# EAGLE board ParticlePCB (EAGLE 9.3.0)
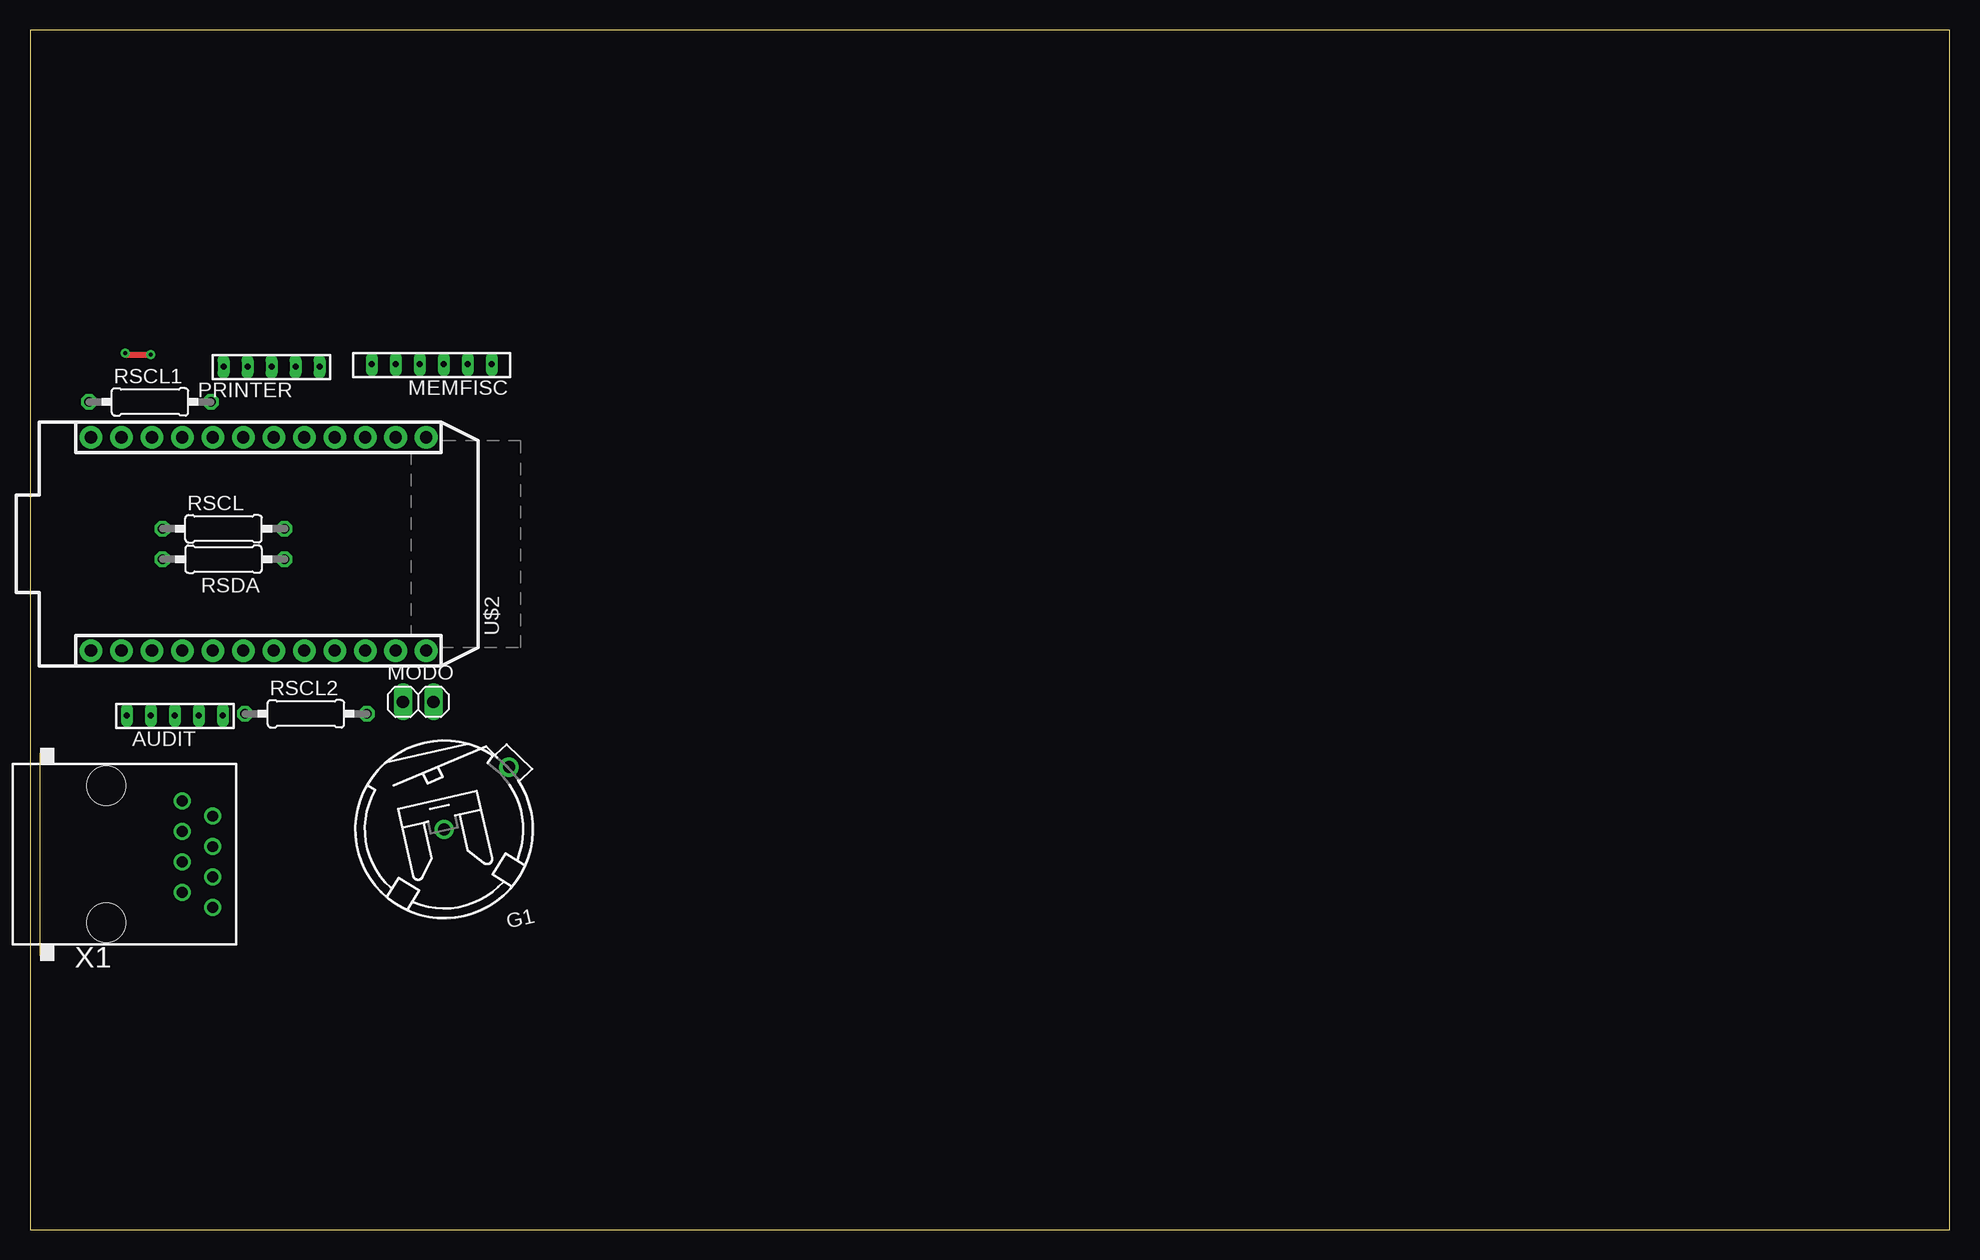
[diagram p0: board, top side]
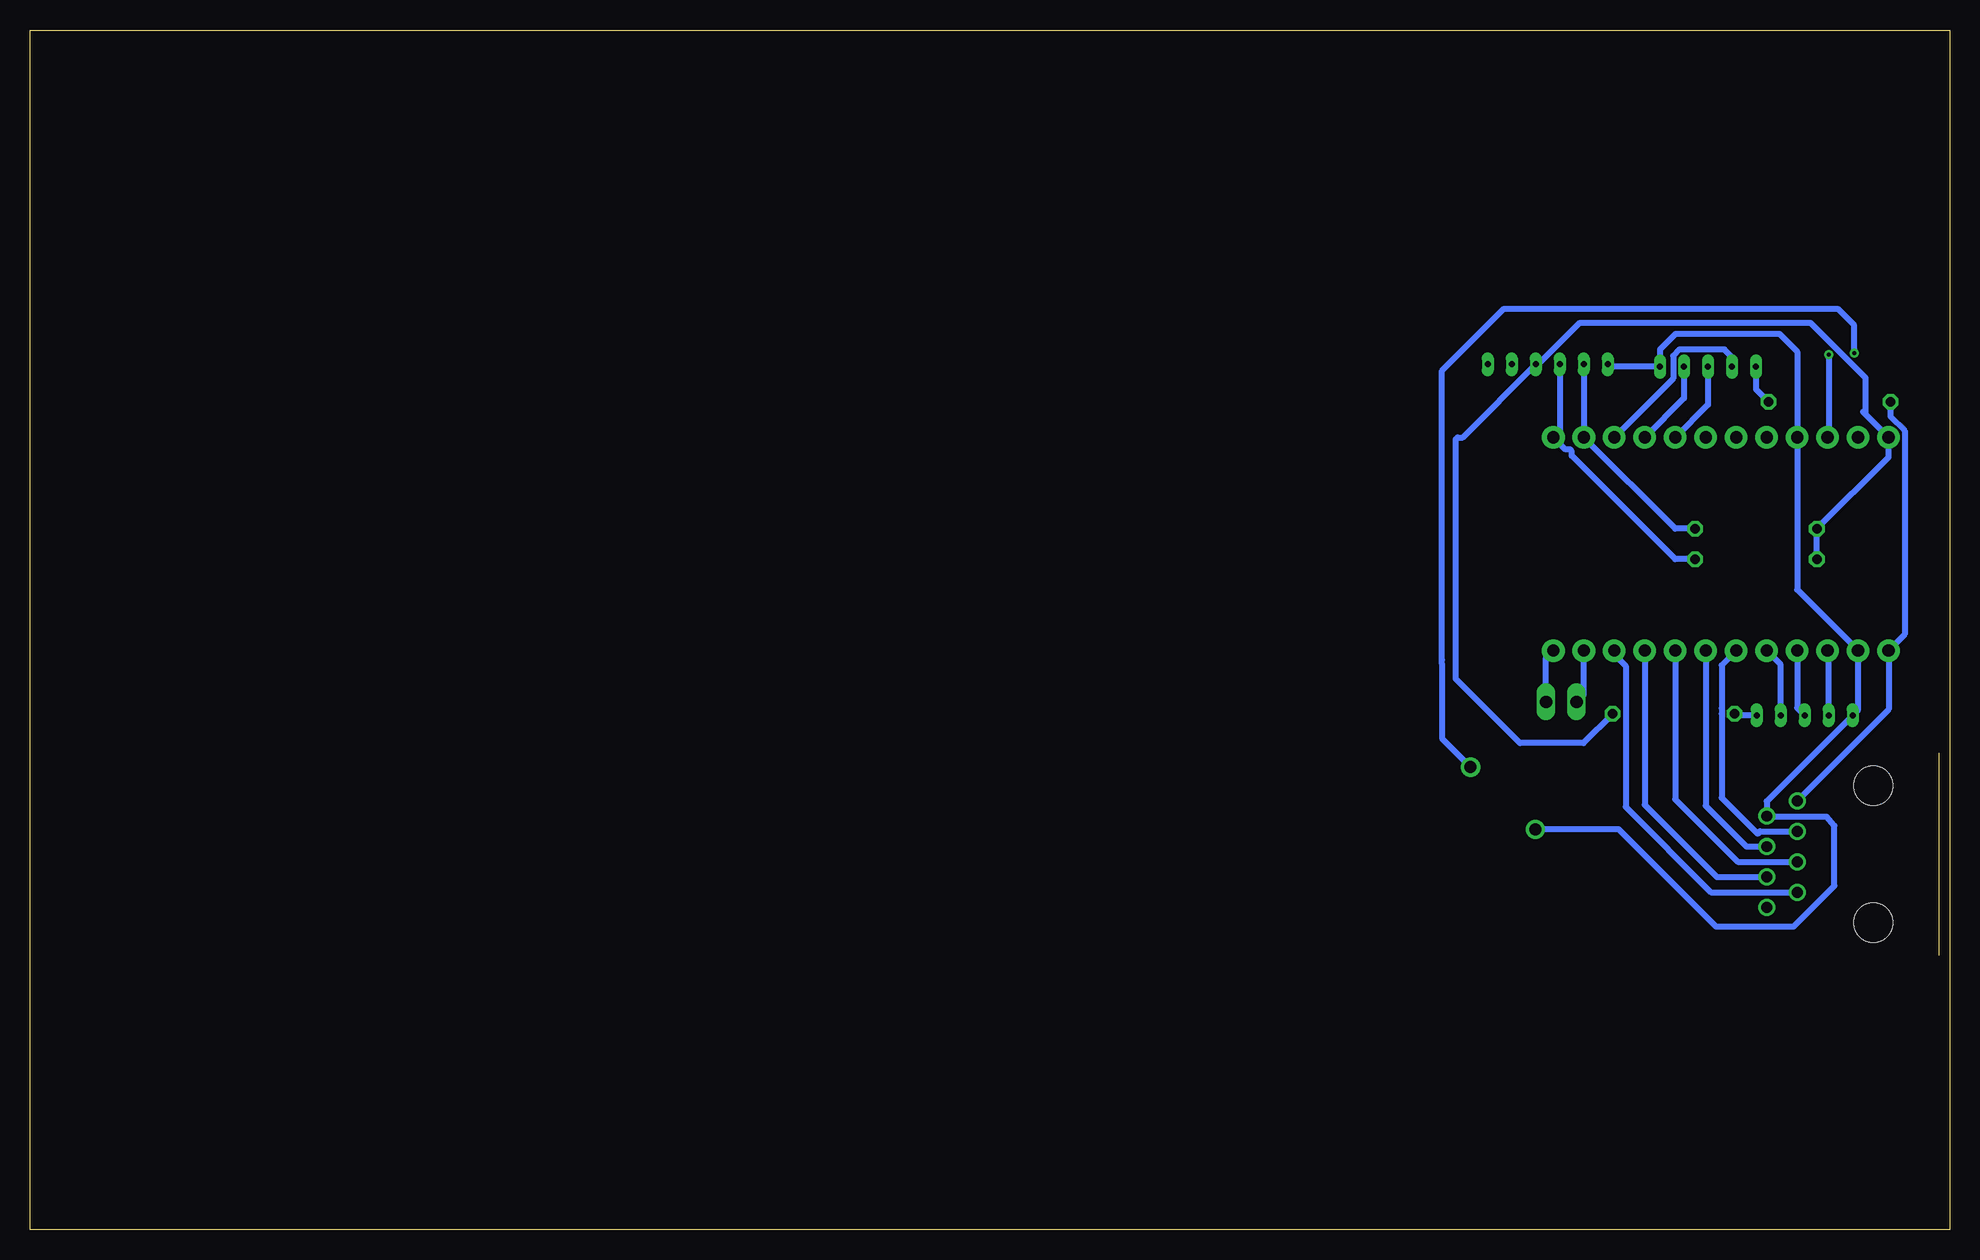
[diagram p1: board, bottom side, seen from below]

Size 160 x 100 mm. Coordinates in mm from the lower left corner, seen from the top.
Outline: 0,0 160,0 160,100 0,100 0,0
Copper layers (1*16): Top 0.035mm / dielectric 1.5mm / Bottom 0.035mm
Design rules "default": minimum track width 6mil, minimum drill 0.35mm, track to track 6mil, track to pad 6mil, pad to pad 6mil, via to via 6mil, smd to smd 6mil, copper to edge 40mil, drill to drill 6mil, minimum pad ring 10mil, minimum via ring 8mil, stop-mask expansion 4mil, vias tented up to drill 0mil, thermal gap 10mil

## Footprints (pad centres in the part's own frame; a part is rotated, then mirrored left to right if it is on the bottom)
53047-05 = drill 0.5 pad 0.698 long: 1 0,2.55; 2 2,2.55; 3 4,2.55; 4 6,2.55; 5 8,2.55
CH23-1220LF = drill 1 pad 1.6: + -6.425,-3.862; - 0,0
53047-06 = drill 0.5 pad 0.698 long: 1 7,0.45; 2 5,0.45; 3 3,0.45; 4 1,0.45; 5 -1,0.45; 6 -3,0.45
1X02 = drill 1.016 long: 1 -1.27,0; 2 1.27,0
0207/10 = drill 0.813 octagon: 1 -5.08,0; 2 5.08,0
PHOTON = drill 1.016 pad 1.88: 1 1.27,33.02; 2 1.27,30.48; 3 1.27,27.94; 4 1.27,25.4; 5 1.27,22.86; 6 1.27,20.32; 7 1.27,17.78; 8 1.27,15.24; 9 1.27,12.7; 10 1.27,10.16; 11 1.27,7.62; 12 1.27,5.08; 13 19.05,5.08; 14 19.05,7.62; 15 19.05,10.16; 16 19.05,12.7; 17 19.05,15.24; 18 19.05,17.78; 19 19.05,20.32; 20 19.05,22.86; 21 19.05,25.4; 22 19.05,27.94; 23 19.05,30.48; 24 19.05,33.02
RJ45-NO-SHIELD = drill 0.9 pad 1.4: 1 -4.445,6.35; 2 -3.175,8.89; 3 -1.905,6.35; 4 -0.635,8.89; 5 0.635,6.35; 6 1.905,8.89; 7 3.175,6.35; 8 4.445,8.89 | hole 3.251: -5.715,0; 5.715,0

## Placement (x,y rotation side)
AUDIT  53047-05  [53047-05]  8.08,40.31 0 top
G1  CH23-1220LF  [CH23-1220LF]  34.51,33.36 192.8 top
MEMFISC  53047-06  [53047-06]  35.48,72.58 180 top
MODO  TECNICO  [1X02]  32.36,43.99 0 top
PRINTER  53047-05  [53047-05]  16.13,69.39 0 top
RSCL  10k  [0207/10]  16.13,58.42 0 top
RSCL1  10k  [0207/10]  10,69 0 top
RSCL2  10k  [0207/10]  23,43 0 top
RSDA  10k  [0207/10]  16.13,55.88 180 top
U$2  PHOTON_WITH_HEADERS  [PHOTON]  38.1,46.99 90 top
X1  RJ45-6L-B  [RJ45-NO-SHIELD]  6.35,31.29 270 top

## Library data of the parts
AUDIT MEMFISC PRINTER = PNP
G1 = battery
MODO = pinhead
RSCL RSCL1 RSCL2 RSDA = rcl; SPICEPREFIX: R
U$2 = Particle-Devices
X1 = con-tycoelectronics; MPN: RJ45-6L-B; OC_FARNELL: unknown; OC_NEWARK: 16R6090

## Nets
+3V3: MEMFISC.4 RSCL2.2 RSCL.1 RSDA.2 U$2.24
+5V: RSCL1.1 U$2.1 X1.1
A2: MEMFISC.5
A3: MEMFISC.6
BLK: AUDIT.4 U$2.5
DTR: PRINTER.3 U$2.17
GND: AUDIT.1 G1.- MEMFISC.1 PRINTER.5 U$2.2 U$2.21 X1.2
MODOTEC0: MODO.2 U$2.12
MODOTEC1: MODO.1 U$2.11
N$1: PRINTER.1 RSCL1.2
N$2: AUDIT.5 RSCL2.1
N$3: U$2.6 X1.3
N$4: U$2.7 X1.4
N$5: U$2.8 X1.5
N$6: U$2.9 X1.6
N$7: U$2.10 X1.7
RX: AUDIT.3 U$2.4
RXP: PRINTER.2 U$2.15
SCL: MEMFISC.2 RSCL.2 U$2.14
SDA: MEMFISC.3 RSDA.1 U$2.13
TX: AUDIT.2 U$2.3
TXP: PRINTER.4 U$2.16
VBAT: G1.+ U$2.22

## Tracks (layer width: path | path; a pad name or v marks a point on that pad's centre or on a via)
+3V3
  Bottom 0.508: RSDA.2 RSCL.1 5.08,64.39 U$2.24 7.02,67.98 | 7.21,68.17 7.02,67.98 | RSCL2.2 30.52,40.56 35.8,40.56 41.15,45.91 41.15,65.89 41,66.04 40.57,66.04 MEMFISC.4 34.27,72.13 30.81,75.59 11.6,75.59 7,71 7,68 7.02,67.98
+5V
  Bottom 0.508: X1.1 5.08,43.35 U$2.1 3.73,49.61 3.73,66.6 4.92,67.78 RSCL1.1
BLK
  Bottom 0.508: AUDIT.4 14.08,47.1 U$2.5
DTR
  Bottom 0.508: PRINTER.3 20.13,68.77 U$2.17
GND
  Bottom 0.508: MEMFISC.1 28.29,71.94 PRINTER.5 24.13,73.37 22.83,74.67 14.17,74.67 12.7,73.2 U$2.21 12.7,53.34 U$2.2 7.62,43.32 AUDIT.1 15.24,35.7 X1.2 15.08,34.4 10.24,34.4 9.59,33.66 9.59,28.66 13.01,25.23 19.44,25.23 27.56,33.36 G1.-
MODOTEC0
  Bottom 0.508: MODO.2 33.63,47.65 U$2.12
MODOTEC1
  Bottom 0.508: MODO.1 30.48,44.6 U$2.11
N$1
  Bottom 0.508: PRINTER.1 16.13,70.05 RSCL1.2
N$2
  Bottom 0.508: AUDIT.5 17.78,42.86 RSCL2.1
N$3
  Bottom 0.508: 18.99,43.44 18.99,43 | 18.99,43 18.99,35.99 16,33 15.8,33.2 X1.3 | U$2.6 19,47.04 19,43.01 18.99,43
N$4
  Bottom 0.508: U$2.7 20.32,35.32 16.93,31.93 X1.4
N$5
  Bottom 0.508: U$2.8 22.86,35.86 17.66,30.66 X1.5
N$6
  Bottom 0.508: U$2.9 25.4,35.4 19.39,29.39 X1.6
N$7
  Bottom 0.508: X1.7 19.89,28.11 27,35.23 27,47 27.94,47.94 U$2.10
RX
  Bottom 0.508: U$2.4 12.7,43.48 AUDIT.3
RXP
  Bottom 0.508: U$2.15 23.04,70.94 23.04,72.82 22.51,73.35 18.75,73.35 18.13,72.73 PRINTER.2
SCL
  Bottom 0.508: RSCL.2 22.86,58.42 U$2.14 MEMFISC.2
SDA
  Bottom 0.508: RSDA.1 22.86,55.88 31.5,64.52 31.5,64.88 31.64,65.02 32,65.02 U$2.13 32.48,66.58 MEMFISC.3
TX
  Bottom 0.508: AUDIT.2 10.08,48.18 U$2.3
TXP
  Bottom 0.508: PRINTER.4 22.13,69.31 U$2.16
VBAT  (via drill 0.35)
  Top 0.508: v7.95,73.06 8.05,72.94 v10.05,72.94
  Bottom 0.508: v7.95,73.06 7.95,75.38 9.32,76.76 37.15,76.76 42.31,71.59 42.31,47.5 42.31,47.13 42.31,40.94 G1.+ | v10.05,72.94 10.05,66.14 U$2.22